# Altium PCB LSPX.PcbDoc
Units mm, origin at the board's own origin, x right, y up, seen from the top; angles counter-clockwise.
Board outline 77.27 x 79.99 mm, 2 copper layers (Top Layer, Bottom Layer); 42 components, 34 nets, 135 pads, 2 vias.
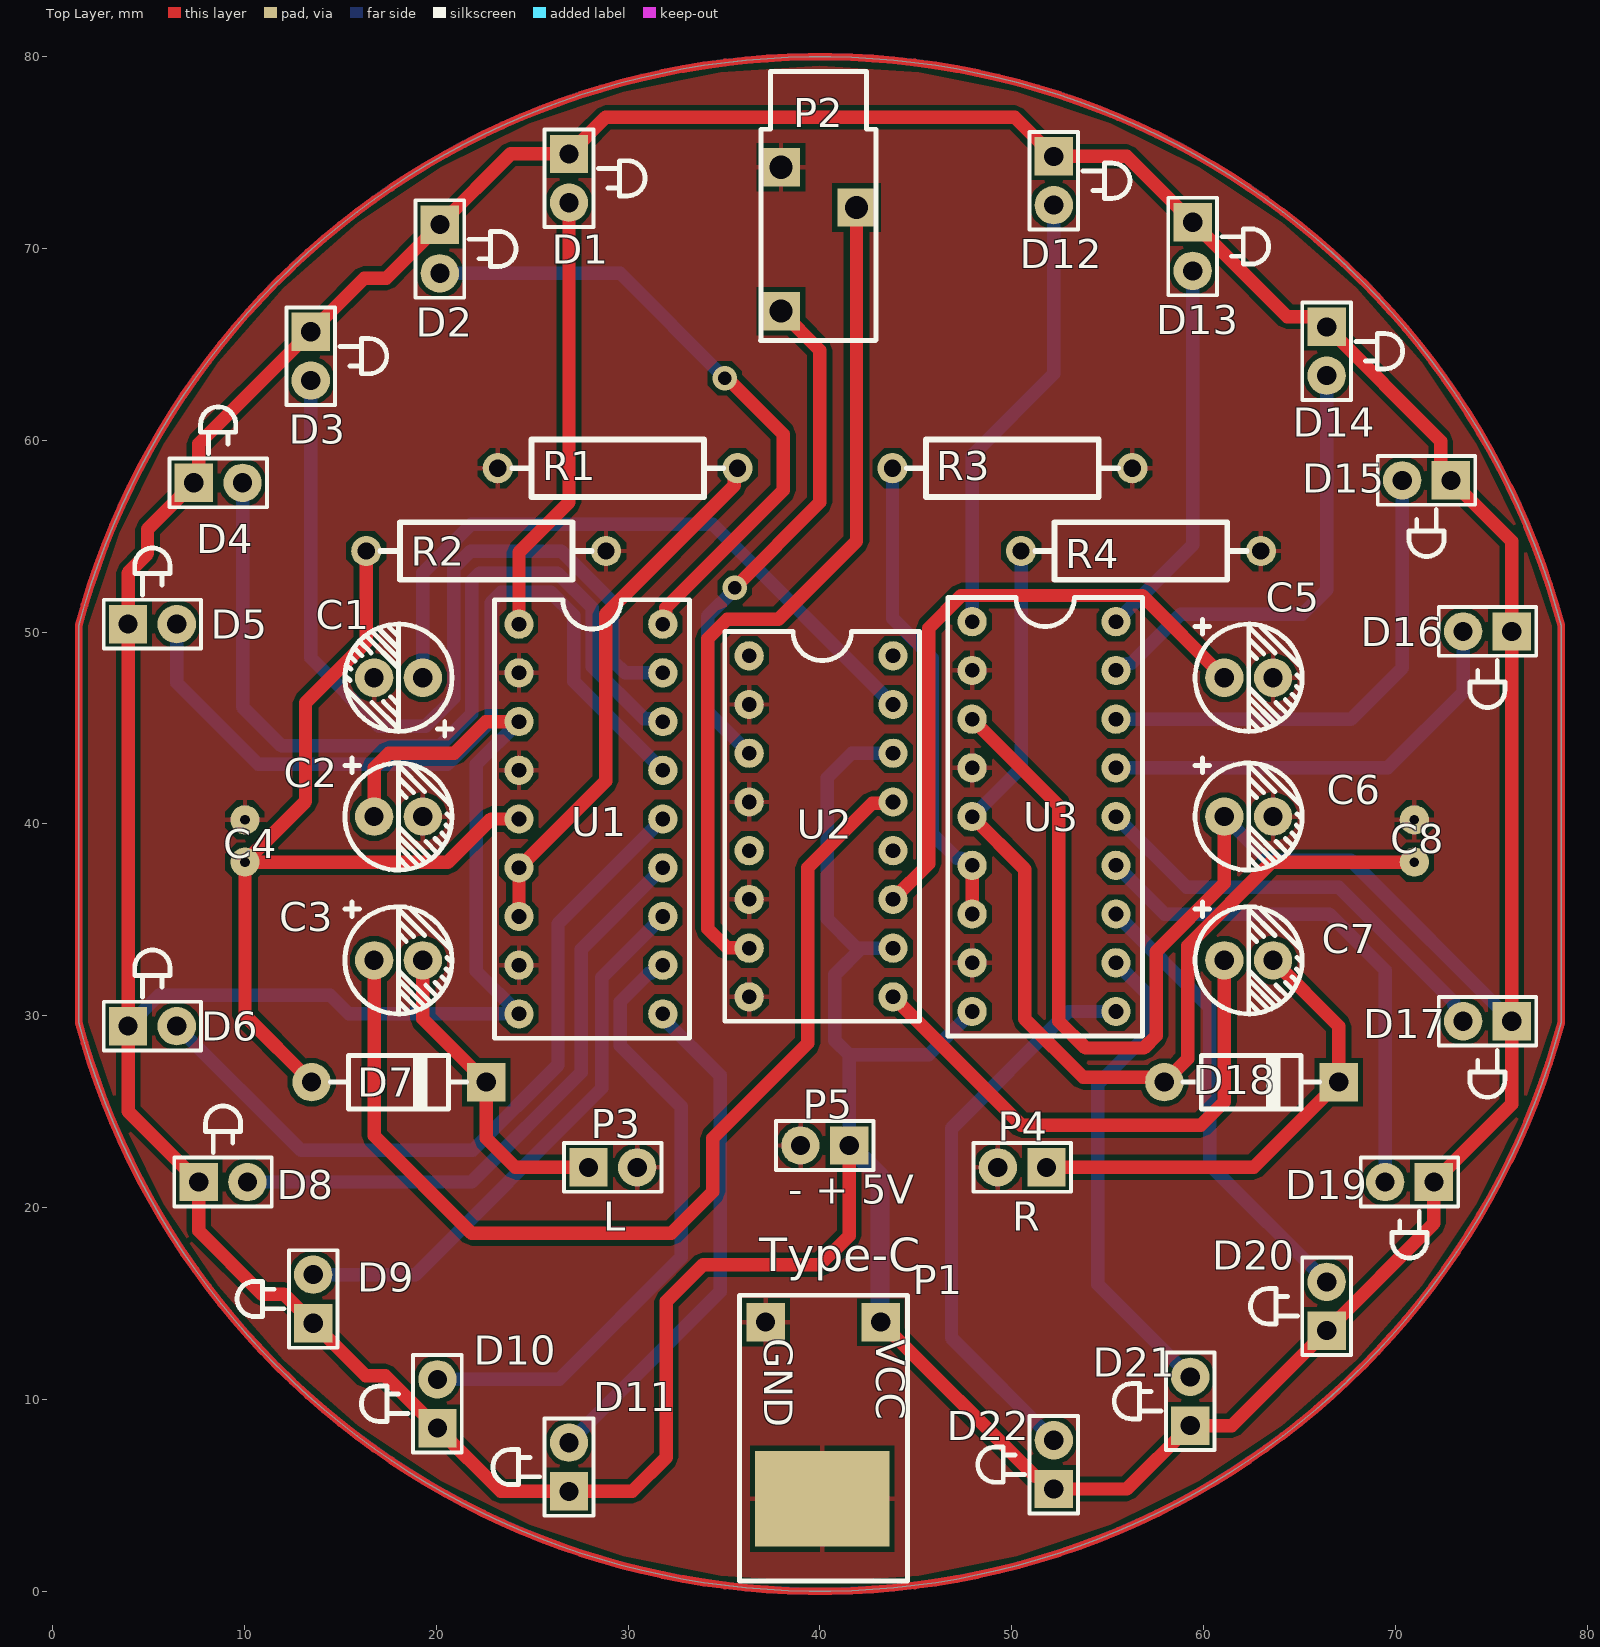
[diagram p0: Top Layer view]
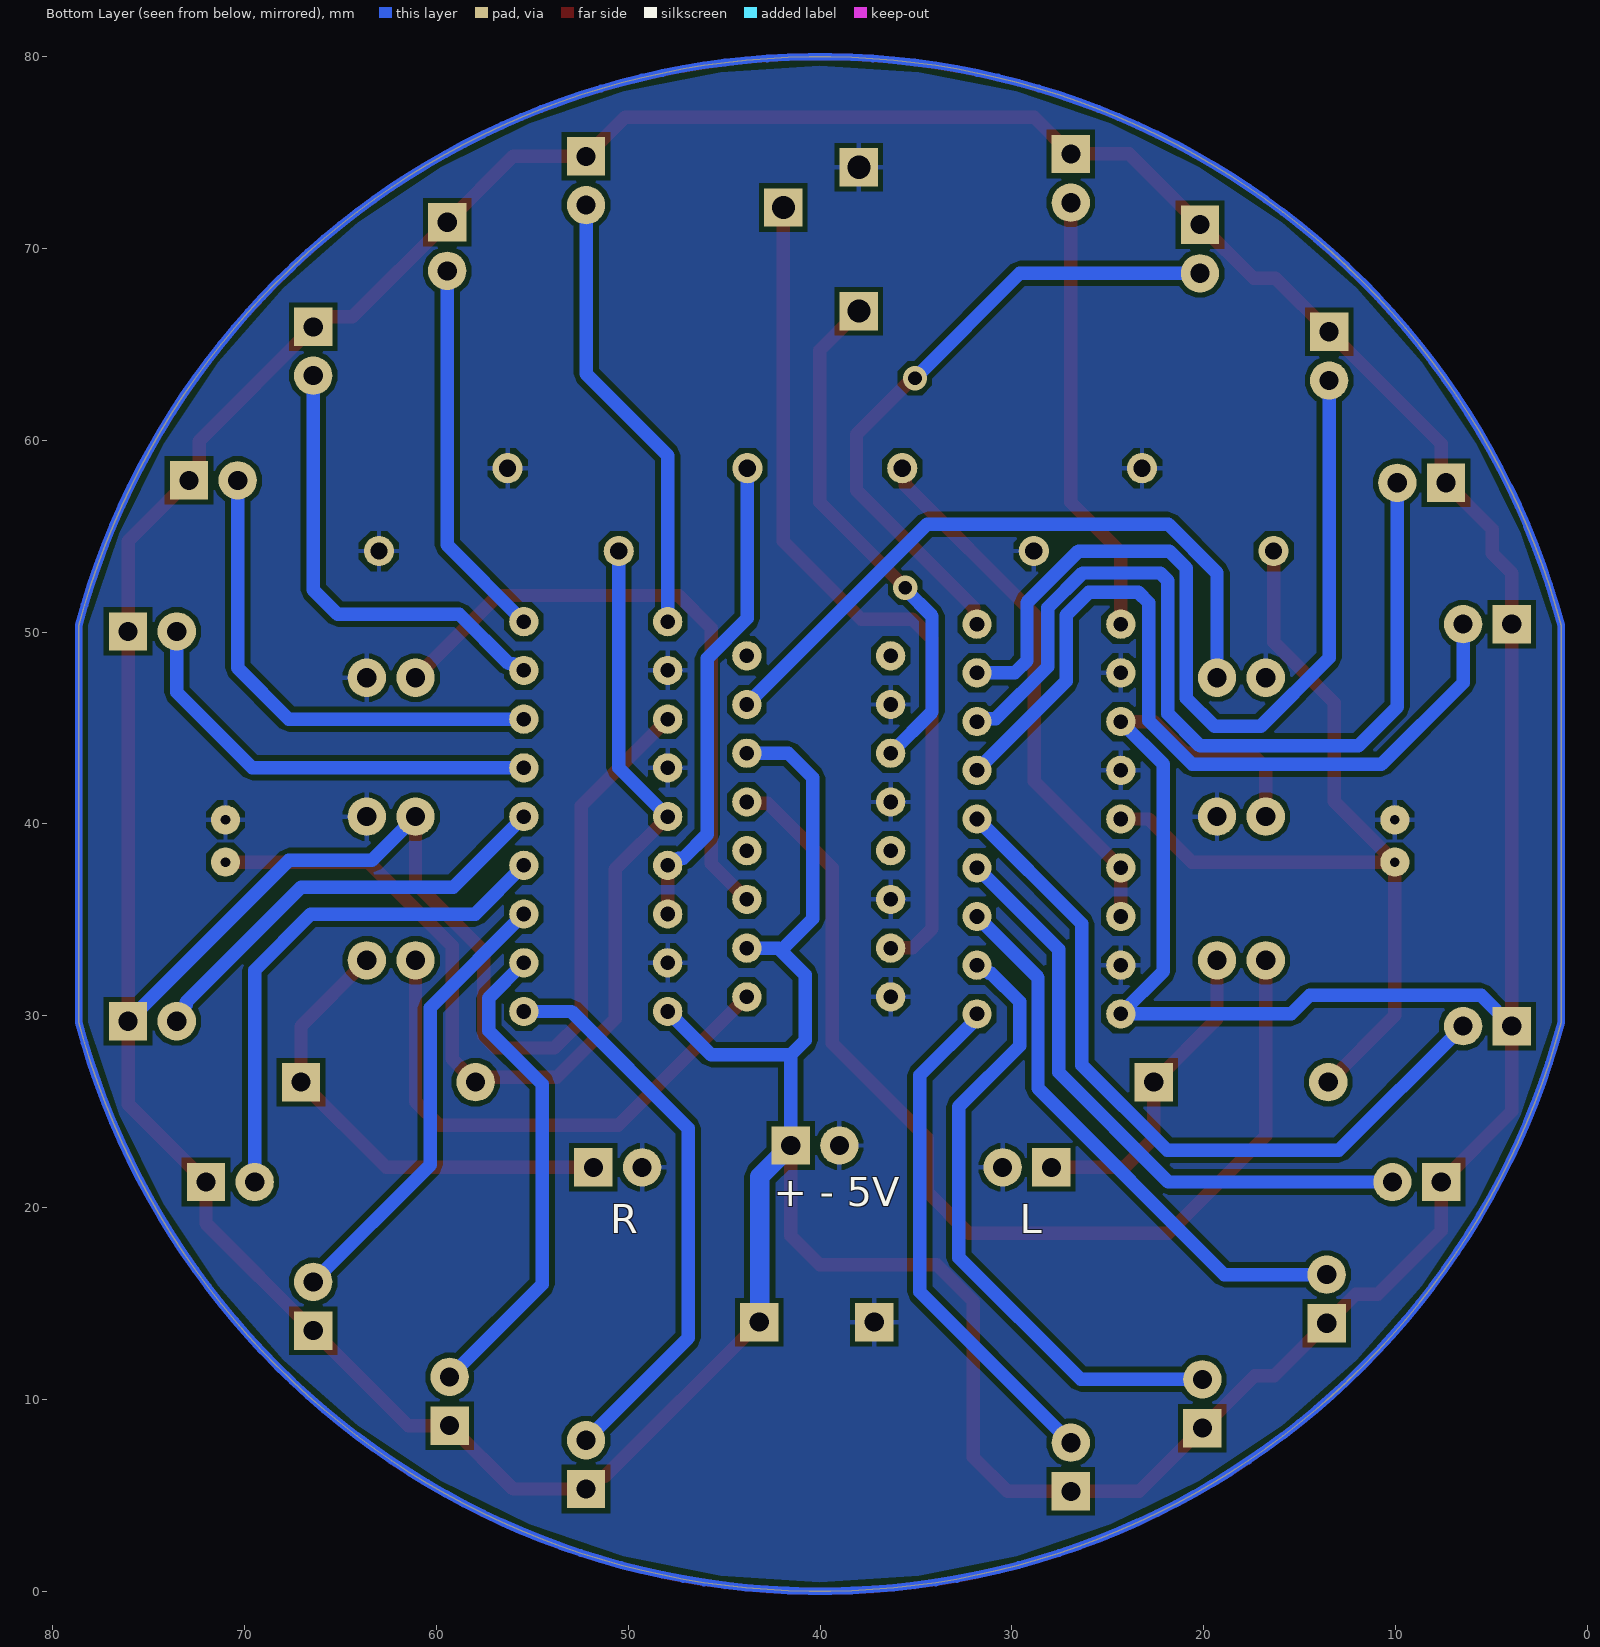
[diagram p1: Bottom Layer view, seen from below]

## Layer stack, top to bottom
Top Solder: solder mask 0.0102, Solder Resist, Dk 3.5
Top Layer: signal copper 0.0356
Dielectric 1: dielectric 0.32, FR-4, Dk 4.8
Bottom Layer: signal copper 0.0356
Bottom Solder: solder mask 0.0102, Solder Resist, Dk 3.5

## Board outline
1.368,29.647 1.368,50.353 cw(c40.005,40) 78.642,50.353 78.642,29.647 cw(c40.005,40)

## Design rules (kind name [scope] priority, off if disabled: settings)
Clearance [All] p1: gap=0.254 ignorepadtopadclearanceinfootprint=FALSE except(0: Arc-Hole Track-Hole SMDPad-Hole THPad-Hole Via-Hole Fill-Hole Poly-Hole Region-Hole Text-Hole)
HoleSize [All] p1: absolutevalues=TRUE maxlimit=0.5 minlimit=0.3 maxpercent=80.000 minpercent=20.000
PolygonConnect [All] p1: connectstyle=Relief reliefconductorwidth=0.254 reliefentries=4 polygonreliefangle="90 Angle" airgapwidth=0.254
RoutingVias [All] p1: holewidth=0.711 width=1.27 viastyle="Through Hole" minholewidth=0.711 minwidth=1.27 maxholewidth=0.711 maxwidth=1.27
SolderMaskExpansion [All] p1: expansion=0.102 istentingtop=FALSE
Width AUDIO_R [InNet('R_IN')] p1: maxlimit=5 minlimit=0.4 preferedwidth=0.7 minimp=50.000000 maximp=50.000000 favimp=50.000000
Width AUDIO_L [InNet('L_IN')] p2: maxlimit=5 minlimit=0.4 preferedwidth=0.7 minimp=50.000000 maximp=50.000000 favimp=50.000000
Width VCC [InNet('VCC')] p3: maxlimit=5 minlimit=0.4 preferedwidth=0.7 minimp=50.000000 maximp=50.000000 favimp=50.000000
Width GND [InNet('Lout_Low')] p4: maxlimit=5 minlimit=0.4 preferedwidth=1 minimp=50.000000 maximp=50.000000 favimp=50.000000
Width [All] p5: maxlimit=50 minlimit=0.4 preferedwidth=0.7 minimp=50.000000 maximp=50.000000 favimp=50.000000
29 further rules are at their usual default settings.

## Classes and differential pairs
net class GND: Lout_Low

## Components (designator, comment, footprint, x,y, rotation, side; value= is the part's Value field where it differs from the comment)
C1 "10uF" "极性电容_2.54mm直插 - duplicate" 18.034,47.625 r180 top
C2 "100uF" "极性电容_2.54mm直插 - duplicate" 18.034,40.386 r0 top
C3 "1000uF" "极性电容_2.54mm直插 - duplicate" 18.034,32.893 r0 top
C4 "1uF" 电容104 10.033,39.116 r270 top
C5 "10uF" "极性电容_2.54mm直插 - duplicate" 62.357,47.625 r0 top
C6 "100uF" "极性电容_2.54mm直插 - duplicate" 62.357,40.386 r0 top
C7 "1000uF" "极性电容_2.54mm直插 - duplicate" 62.357,32.893 r0 top
C8 "1uF" 电容104 70.993,39.116 r270 top
D1 "LED" LED 26.924,73.66 r270 top
D2 "LED" LED 20.193,69.977 r270 top
D3 "LED" LED 13.462,64.389 r270 top
D4 "LED" LED 8.636,57.785 r0 top
D5 "LED" LED 5.207,50.419 r0 top
D6 "LED" LED 5.207,29.464 r0 top
D7 "1N4007" 二极管1N4007 18.034,26.543 r0 top
D8 "LED" led 8.89,21.336 r0 top
D9 "LED" led 13.589,15.24 r90 top
D10 "LED" led 20.066,9.779 r90 top
D11 "LED" led 26.924,6.477 r90 top
D12 "LED" LED 52.197,73.533 r270 top
D13 "LED" LED 59.436,70.104 r270 top
D14 "LED" LED 66.421,64.643 r270 top
D15 "LED" LED 71.628,57.912 r180 top
D16 "LED" LED 74.803,50.038 r180 top
D17 "LED" LED 74.803,29.718 r180 top
D18 "1N4007" 二极管1N4007 62.484,26.543 r0 top
D19 "LED" led 70.739,21.336 r180 top
D20 "LED" led 66.421,14.859 r90 top
D21 "LED" led 59.309,9.906 r90 top
D22 "LED" led 52.197,6.604 r90 top
P1 "POWER" 2Pin_Type-C正 40.132,8.001 r270 top
P2 "3.5mm音频口" 3.5耳机孔_小 42.926,65.22 r90 top
P3 "左喇叭" 2pin插针 29.21,22.098 r0 top
P4 "右喇叭" 2pin插针 50.546,22.098 r180 top
P5 "POWER" 2pin插针 40.259,23.241 r180 top
R1 "1K" 7.62mm直插 29.464,58.547 r0 top
R2 "100K" 7.62mm直插 22.606,54.229 r180 top
R3 "1K" 7.62mm直插 50.038,58.547 r180 top
R4 "100K" 7.62mm直插 56.742,54.229 r180 top
U1 "LM3915" 9Pin插座_18 28.067,40.259 r0 top
U2 "2xLM386" 2xLM386 40.065,39.878 r0 top
U3 "LM3915" 9Pin插座_18 51.689,40.386 r0 top

## Footprints (in the part's own frame and the unit in brackets; to place one, negate y for a bottom-side part, rotate by r counter-clockwise, add the part's x,y. Pads: shape width x height; smd on the part's side, far side on the other; paste and mask are expansions set on the pad)
2Pin_Type-C正 [mm]
  rect 2x2 hole 1: 1(-6.033,3.04) 2(-6.032,-2.96)
  silkscreen extent -7.43,-4.33 7.47,4.44, body extent -1.48,-4.62 7.62,4.62, height 3.35
2pin插针 [mm]
  rect 2x2 hole 1: 1(-1.27,0)
  round 2 hole 1: 2(1.27,0)
  silkscreen extent -2.54,-1.27 2.54,1.27, body extent -2.54,-1.27 2.54,1.27, height 8.5
2xLM386 [mil]
  round 60 hole 30: 1(-147.64,350) 1(-147.64,350) 2(-147.64,250) 3(-147.64,150) 4(-147.64,50) 5(-147.64,-50) 6(-147.64,-150) 7(-147.64,-250) 8(-147.64,-350) 9(147.64,-350) 10(147.64,-250) 11(147.64,-150) 12(147.64,-50) 13(147.64,50) 14(147.64,150) 15(147.64,250) 16(147.64,350)
  silkscreen extent -198,-400 202,400, body extent -150,-413 155,413, height 177
3.5耳机孔_小 [mm]
  rect 2x2 hole 1.2: 1(9.016,4.953) 2(6.916,1.016) 3(1.516,4.953)
  silkscreen extent -0.01,0 14,6.01, body extent -1.88,-1.02 16.15,7.08, height 12.35
7.62mm直插 [mm]
  round 1.575 hole 0.9: 1(-6.25,0) 2(6.25,0)
  silkscreen extent -5.5,-1.5 5.5,1.5, body extent -6.5,-1.51 6.5,1.51, height 3.11
9Pin插座_18 [mil]
  round 60 hole 30: 1(-147.64,400) 1(-147.64,400) 2(-147.64,300) 3(-147.64,200) 4(-147.64,100) 5(-147.64,0) 6(-147.64,-100) 7(-147.64,-200) 8(-147.64,-300) 9(-147.64,-400) 10(147.64,-400) 11(147.64,-300) 12(147.64,-200) 13(147.64,-100) 14(147.64,0) 15(147.64,100) 16(147.64,200) 17(147.64,300) 18(147.64,400)
  silkscreen extent -198,-450 202,450, body extent -154,-457 154,457, height 180
LED [mm]
  rect 2x2 hole 1: 1(-1.27,0)
  round 2 hole 1: 2(1.27,0)
  silkscreen extent -2.54,-1.27 2.54,3.96, body extent -1.95,-1.95 1.64,1.95, height 5.55
led [mm]
  rect 2x2 hole 1: 1(-1.27,0)
  round 2 hole 1: 2(1.27,0)
  silkscreen extent -2.54,-1.27 2.54,3.96, body extent -1.95,-1.95 1.64,1.95, height 5.55
二极管1N4007 [mm]
  rect 2x2 hole 1: 1(4.572,0)
  round 2 hole 1: 2(-4.528,0)
  silkscreen extent -3.56,-1.4 3.56,1.4, body extent -4.92,-1.29 4.98,1.31, height 2.65
"极性电容_2.54mm直插 - duplicate" [mm]
  round 2 hole 1: 1(-1.27,0) 2(1.27,0)
  silkscreen extent -2.79,-2.79 2.79,3.05, body extent -3.15,-3.15 3.16,3.15, height 11.24
电容104 [mm]
  round 1.524 hole 0.5: 1(-1.1,0) 2(1.1,0)
  body extent -2.4,-0.92 2.4,0.92, height 4.8

## Part data
C1 C2 C3 C5 C6 C7: library part ECAP, "电容_极性"
C4 C8: library part CAP, "电容_普通"
D1 D2 D3 D4 D5 D6 D8 D9 D10 D11 D12 D13 D14 D15 D16 D17 D19 D20 D21 D22: "二极管_发光"
D7 D18: library part DIO, "二极管_普通"
P1 P3 P4 P5: library part PIN2, "2Pin插针"
P2: library part PIN3, "3Pin插针"
R1 R2 R3 R4: library part RES, "电阻"
U1 U3: "LED驱动IC"
U2: "两个LM386"

## Free pads (board coordinates)
  rect 7x5 smd: GND_Big(40.132,4.826)

## Via types
v1: diameter 1.27, hole 0.711, Top Layer to Bottom Layer, 2 vias

## Nets (pads, with @x,y where several pads share a name; then routed paths per layer and width w, separated by ;. In a path a pad name is that pad's centre, name@x,y a point inside that pad or via, vN(x,y) a via of type N, cw(c..) or ccw(c..) an arc to the next point about the centre after c; other vN are vias at no path point)
L_IN: P2.3 U2.3 | length 27.2
  Top Layer w0.7: v1(35.56,52.324) 40.005,56.769 40.005,64.704 P2.3
  Bottom Layer w0.7: v1(35.56,52.324) 35.56,52.24 34.163,50.843 34.163,45.84 U2.3
Lout_High: C3.2 D7.1 P3.1 | length 16.6
  Top Layer w0.7: C3.2 19.304,29.845 D7.1 22.606,23.622 24.13,22.098 P3.1
Lout_Low: C1.2 C2.2 C4.1 C5.2 C6.2 C8.1 P1.2 P2.1 P3.2 P4.2 P5.2 pad.GND_Big R1.1 R2.1 R3.1 R4.1 U1.2 U1.4 U1.8 U2.2 U2.4 U2.6 U2.8 U3.2 U3.4 U3.8
NetC1_1: C1.1 U2.15 | length 34.9
  Bottom Layer w0.7: C1.1 19.304,53.088 21.836,55.62 34.423,55.62 U2.15
NetC3_1: C3.1 U2.13 | length 54.6
  Top Layer w0.7: C3.1 16.764,23.749 21.844,18.669 32.258,18.669 34.417,20.828 34.417,23.622 39.37,28.575 39.37,37.719 42.726,41.075 43.742,41.075 U2.13
NetC4_2: C4.2 D7.2 R2.2 U1.5 | length 47
  Top Layer w0.7: D7.2 10.033,30.016 C4.2 ; R2.2 16.356,49.485 13.19,46.319 13.19,41.173 C4.2 ; U1.5 22.86,40.259 20.617,38.016 C4.2
NetC5_1: C5.1 U2.11 | length 32.8
  Top Layer w0.7: U2.11 45.673,37.926 45.673,50.212 47.373,51.912 56.8,51.912 C5.1
NetC7_1: C7.1 U2.9 | length 27.9
  Top Layer w0.7: U2.9 50.51,24.293 59.853,24.293 61.087,25.527 C7.1
NetC8_2: C8.2 D18.2 R4.2 U3.5 | length 56.5
  Top Layer w0.7: U3.5 50.673,37.652 50.673,29.845 53.726,26.792 57.707,26.792 D18.2 59.182,27.769 59.182,33.655 63.543,38.016 C8.2
  Bottom Layer w0.7: U3.5 50.492,42.939 R4.2
NetD1_2: D1.2 U1.1 | length 23.1
  Top Layer w0.7: U1.1@24.317,50.419 24.317,54.162 26.924,56.769 D1.2
NetD2_2: D2.2 U1.18 | length 33.9
  Top Layer w0.7: U1.18 31.975,50.577 31.975,51.279 38.1,57.404 38.1,60.325 35.179,63.246 v1(35.052,63.246)
  Bottom Layer w0.7: D2.2 29.591,68.707 v1(35.052,63.246)
NetD3_2: D3.2 U1.17 | length 46.5
  Bottom Layer w0.7: D3.2 13.462,48.659 17.036,45.085 19.431,45.085 20.908,46.562 20.908,53.343 21.794,54.229 26.524,54.229 29.21,51.543 29.21,48.514 29.845,47.879 U1.17
NetD4_2: D4.2 U1.16 | length 47.2
  Bottom Layer w0.7: D4.2 9.906,46.101 11.938,44.069 20.193,44.069 21.862,45.738 21.862,52.676 22.272,53.086 26.318,53.086 28.129,51.275 28.129,48.198 30.83,45.497 31.659,45.497 U1.16
NetD5_2: D5.2 U1.15 | length 43.3
  Bottom Layer w0.7: D5.2 6.477,47.371 10.733,43.115 20.588,43.115 22.86,45.387 22.86,51.533 23.397,52.07 25.985,52.07 27.175,50.88 27.175,47.441 U1.15
NetD6_2: D6.2 U1.14 | length 39.5
  Bottom Layer w0.7: D6.2 12.954,22.987 21.904,22.987 26.351,27.434 26.351,34.793 U1.14
NetD8_2: D8.2 U1.13 | length 32.2
  Bottom Layer w0.7: D8.2 21.844,21.336 27.559,27.051 27.559,33.461 U1.13
NetD9_2: D9.2 U1.12 | length 29.3
  Bottom Layer w0.7: D9.2 18.923,16.51 28.637,26.224 28.637,31.999 U1.12
NetD10_2: D10.2 U1.11 | length 33
  Bottom Layer w0.7: D10.2 26.416,11.049 32.766,17.399 32.766,25.273 29.591,28.448 29.591,30.734 31.084,32.227 31.182,32.227 31.594,32.639 U1.11
NetD11_2: D11.2 U1.10 | length 26.8
  Bottom Layer w0.7: D11.2 34.798,15.621 34.798,26.895 31.817,29.876 U1.10
NetD12_2: D12.2 U3.1 | length 23.5
  Bottom Layer w0.7: U3.1@47.939,50.546 47.939,59.211 52.197,63.469 D12.2
NetD13_2: D13.2 U3.18 | length 19.9
  Bottom Layer w0.7: U3.18 59.436,54.543 D13.2
NetD14_2: D14.2 U3.17 | length 24
  Bottom Layer w0.4: D14.2@66.452,63.404 D14.2@66.548,63.5
  Bottom Layer w0.7: U3.17 55.662,48.006 56.023,48.367 56.241,48.367 58.801,50.927 65.151,50.927 66.421,52.197 D14.2
NetD15_2: D15.2 U3.16 | length 25.8
  Bottom Layer w0.7: U3.16 67.691,45.466 70.358,48.133 D15.2
NetD16_2: D16.2 U3.15 | length 22.9
  Bottom Layer w0.7: U3.15 69.596,42.926 73.533,46.863 D16.2
NetD17_2: D17.2 U3.14 | length 22.8
  Bottom Layer w0.7: U3.14 59.122,36.703 67.056,36.703 73.037,30.722 73.037,30.565 73.533,30.07 D17.2
NetD19_2: D19.2 U3.13 | length 27.4
  Bottom Layer w0.4: D19.2@68.865,21.686 D19.2@68.94,21.686
  Bottom Layer w0.7: U3.13 57.979,35.306 66.548,35.306 69.469,32.385 D19.2
NetD20_2: D20.2 U3.12 | length 23.7
  Bottom Layer w0.7: U3.12 60.325,30.42 60.325,22.225 D20.2
NetD21_2: D21.2 U3.11 | length 25.5
  Bottom Layer w0.7: U3.11 57.277,30.928 57.277,29.226 54.483,26.432 54.483,16.002 D21.2
NetD22_2: D22.2 U3.10 | length 29.6
  Bottom Layer w0.7: D22.2 46.863,13.208 46.863,24.13 52.959,30.226 U3.10
NetR1_2: R1.2 U1.6 U1.7 | length 28.1
  Top Layer w0.7: U1.7 U1.6 28.829,42.231 28.829,50.927 35.547,57.645 35.547,58.38 R1.2
NetR3_2: R3.2 U3.6 U3.7 | length 25.2
  Top Layer w0.7: U3.7 U3.6
  Bottom Layer w0.7: R3.2 43.788,50.727 45.868,48.646 45.868,39.476 47.137,38.207 47.355,38.207 47.716,37.846 U3.6
R_IN: P2.2 U2.7 | length 44.9
  Top Layer w0.7: U2.7 36.302,33.541 35.166,33.541 34.163,34.544 34.163,49.657 35.179,50.673 37.846,50.673 41.91,54.737 P2.2
Rout_High: C7.2 D18.1 P4.1 | length 24.9
  Top Layer w0.7: P4.1 62.611,22.098 D18.1 67.056,29.464 C7.2
VCC: C2.1 C6.1 D1.1 D2.1 D3.1 D4.1 D5.1 D6.1 D8.1 D9.1 D10.1 D11.1 D12.1 D13.1 D14.1 D15.1 D16.1 D17.1 D19.1 D20.1 D21.1 D22.1 P1.1 P5.1 U1.3 U1.9 U2.10 U2.14 U3.3 U3.9 | length 412.2
  Top Layer w0.7: C2.1 16.764,42.926 17.526,43.688 20.937,43.688 22.588,45.339 U1.3 ; P5.1 41.529,18.542 40.005,17.018 33.909,17.018 32.004,15.113 32.004,6.985 30.226,5.207 D11.1 23.368,5.207 D10.1 17.335,11.239 16.319,11.239 D9.1 12.065,15.494 10.922,15.494 7.62,18.796 D8.1 3.937,25.019 D6.1 D5.1 3.937,53.086 4.953,54.102 4.953,55.372 7.62,58.039 7.62,59.817 D3.1 16.256,68.453 17.399,68.453 D2.1 23.876,74.93 D1.1 28.829,76.835 50.165,76.835 D12.1 56.007,74.803 D13.1 64.371,66.439 65.895,66.439 D14.1 72.372,59.962 72.372,58.438 D15.1 76.073,54.737 D16.1 D17.1 76.073,25.4 D19.1 72.009,19.177 D20.1 61.468,8.636 D21.1 56.007,5.334 D22.1 51.547,5.984 51.221,5.984 P1.1 ; U3.3 52.451,40.954 52.451,29.718 53.848,28.321 56.896,28.321 57.531,28.956 57.531,33.353 61.087,36.909 C6.1
  Bottom Layer w0.7: D6.1 5.541,31.068 14.469,31.068 15.438,30.099 U1.9 22.098,32.318 22.098,43.12 U1.3 ; P5.1 41.529,27.969 ; 41.91,33.528 40.386,35.052 40.386,42.418 41.656,43.688 U2.14 ; P1.1 43.172,17.526 ; U2.10 42.164,33.528 40.767,32.131 40.767,28.731 41.529,27.969 ; U3.9@48.04,30.125 U3.9 45.682,27.969 41.529,27.969 ; C6.1 63.373,38.1 67.691,38.1 D17.1
  Bottom Layer w1: P5.1 43.143,21.627 P1.1@43.143,14.062
pads on no net: U2.1 U2.5 U2.12 U2.16
copper on no net: | length 501.7
  Top Layer w0.4: 1.368,29.647 ccw(c40.005,40) 78.642,29.647 78.642,50.353 ccw(c40.005,40) 1.368,50.353 1.368,29.647
  Bottom Layer w0.4: 1.368,29.652 ccw(c40.005,40.005) 78.642,29.652 78.642,50.358 ccw(c40.005,40.005) 1.368,50.358 1.368,29.652

## Polygon pours and split planes (outlines as drawn)
Lout_Low on Top Layer "LOUT_LOW_L01_P000" (solid, pour order 0): 1.368,29.647 ccw(c40.005,40) 78.642,29.647 78.642,50.353 ccw(c40.005,40) 1.368,50.353
Lout_Low on Bottom Layer "LOUT_LOW_L02_P001" (solid, pour order 1): 1.368,29.652 ccw(c40.005,40.005) 78.642,29.652 78.642,50.358 ccw(c40.005,40.005) 1.368,50.358

## Silkscreen, mask and mechanical layers (free items; w line width, h text height)
Top Overlay:
  text "- + 5V" at 38.354,20.193 h1.52
  text "L" at 28.702,18.796 h1.52
  text "R" at 50.038,18.796 h1.52
Bottom Overlay:
  text "+ - 5V" at 42.418,20.066 h1.52
  text "L" at 29.591,18.669 h1.52
  text "R" at 50.927,18.669 h1.52

## Text inside footprints (layer, text, board x,y; h text height)
P1: Top Overlay "GND" at 36.604,13.199 h2.54 r270; Top Overlay "VCC" at 42.446,13.142 h2.54 r270; Top Overlay "Type-C" at 36.83,16.105 h3